# Altium PCB PCB_TKeyboard_2021-06-10.pcbdoc
Units mil, origin at the board's own origin, x right, y up, seen from the top; angles counter-clockwise.
Board outline 5610 x 5200 mil, 2 copper layers (Top Layer, Bottom Layer); 26 components, 27 nets, 74 pads, 11 vias.
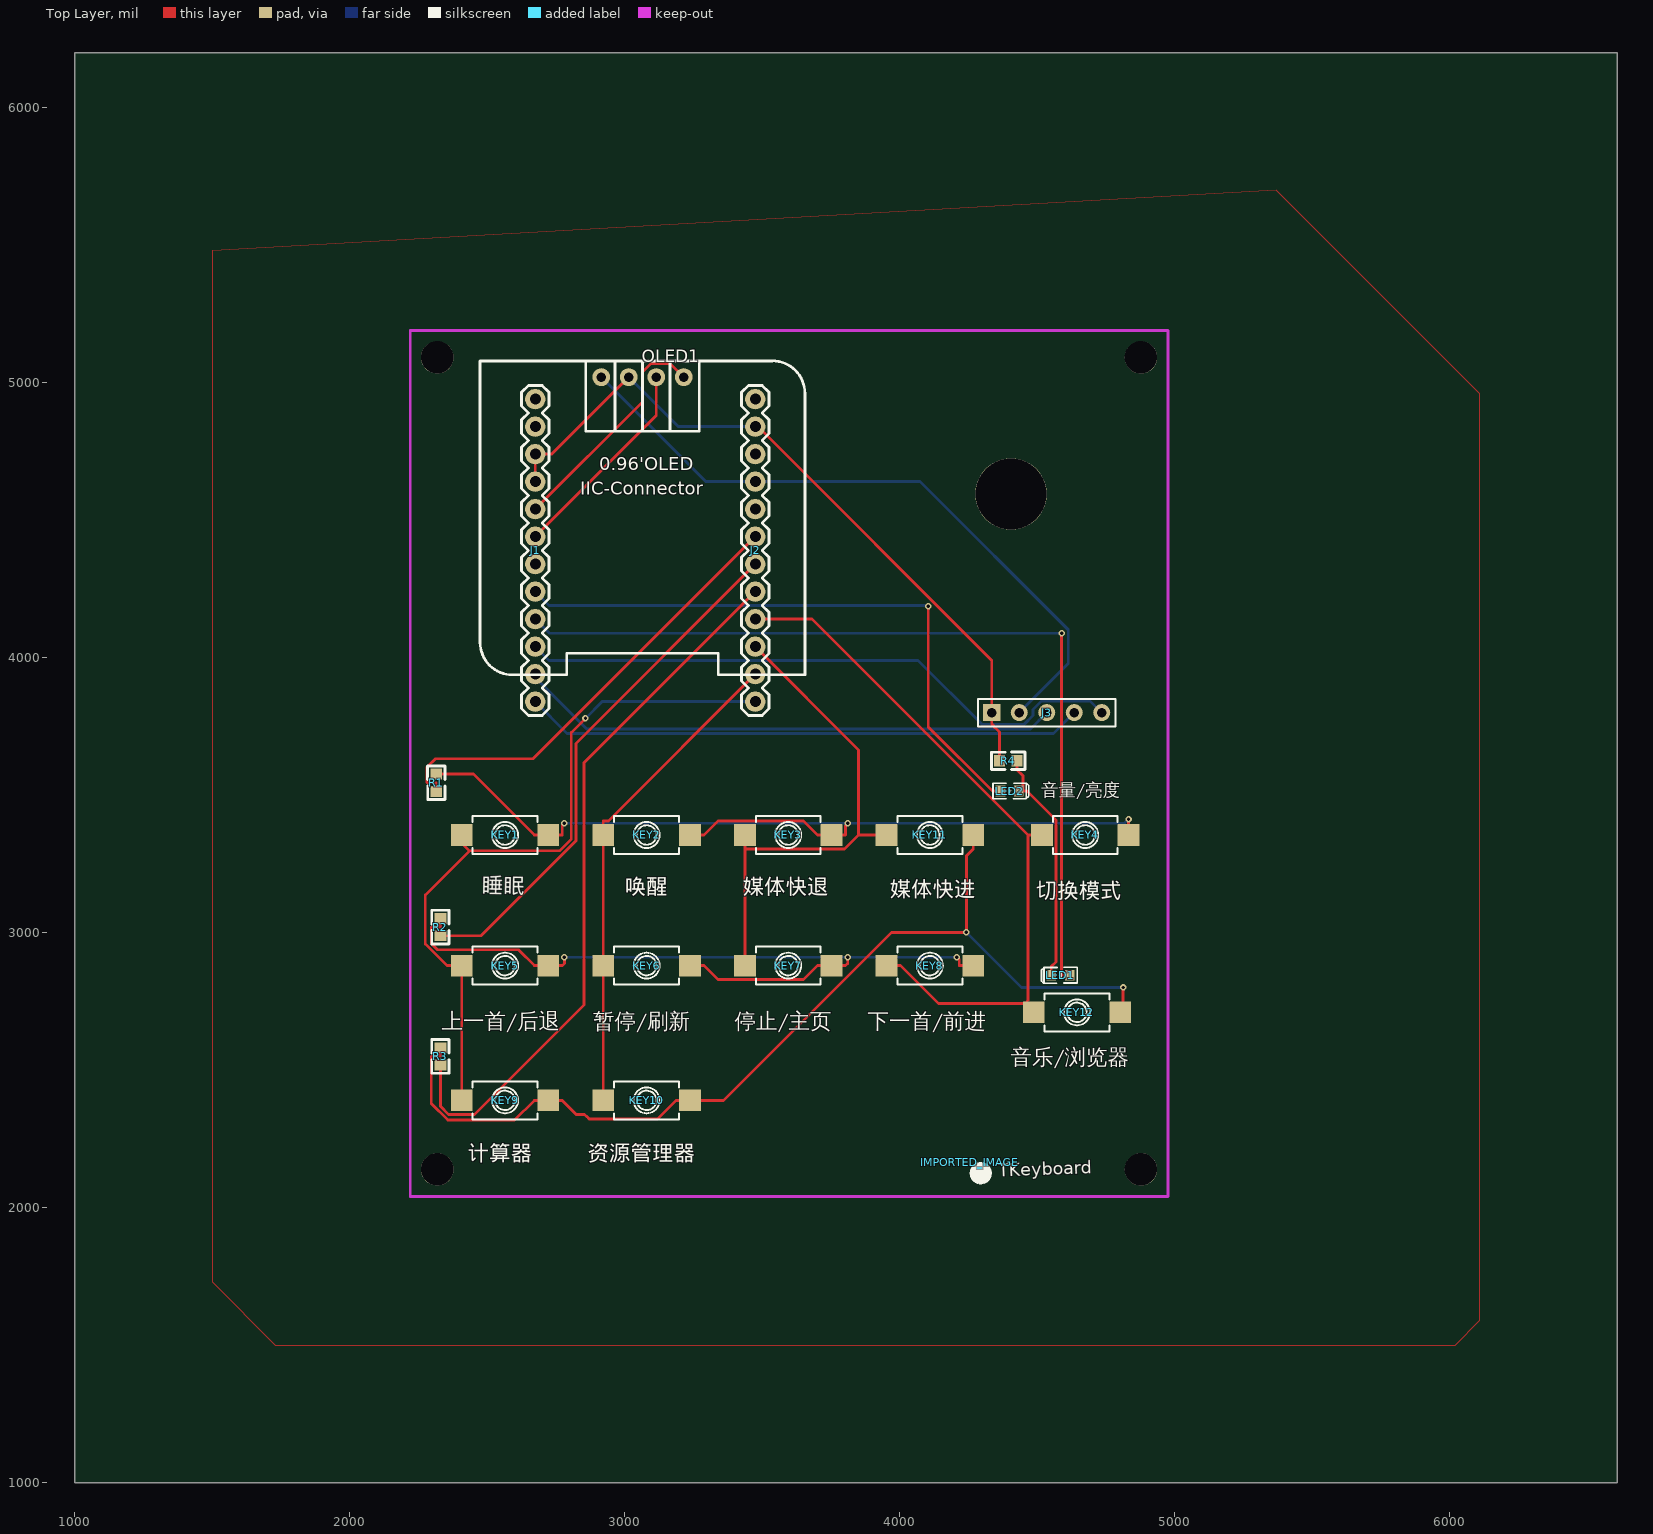
[diagram p0: Top Layer view]
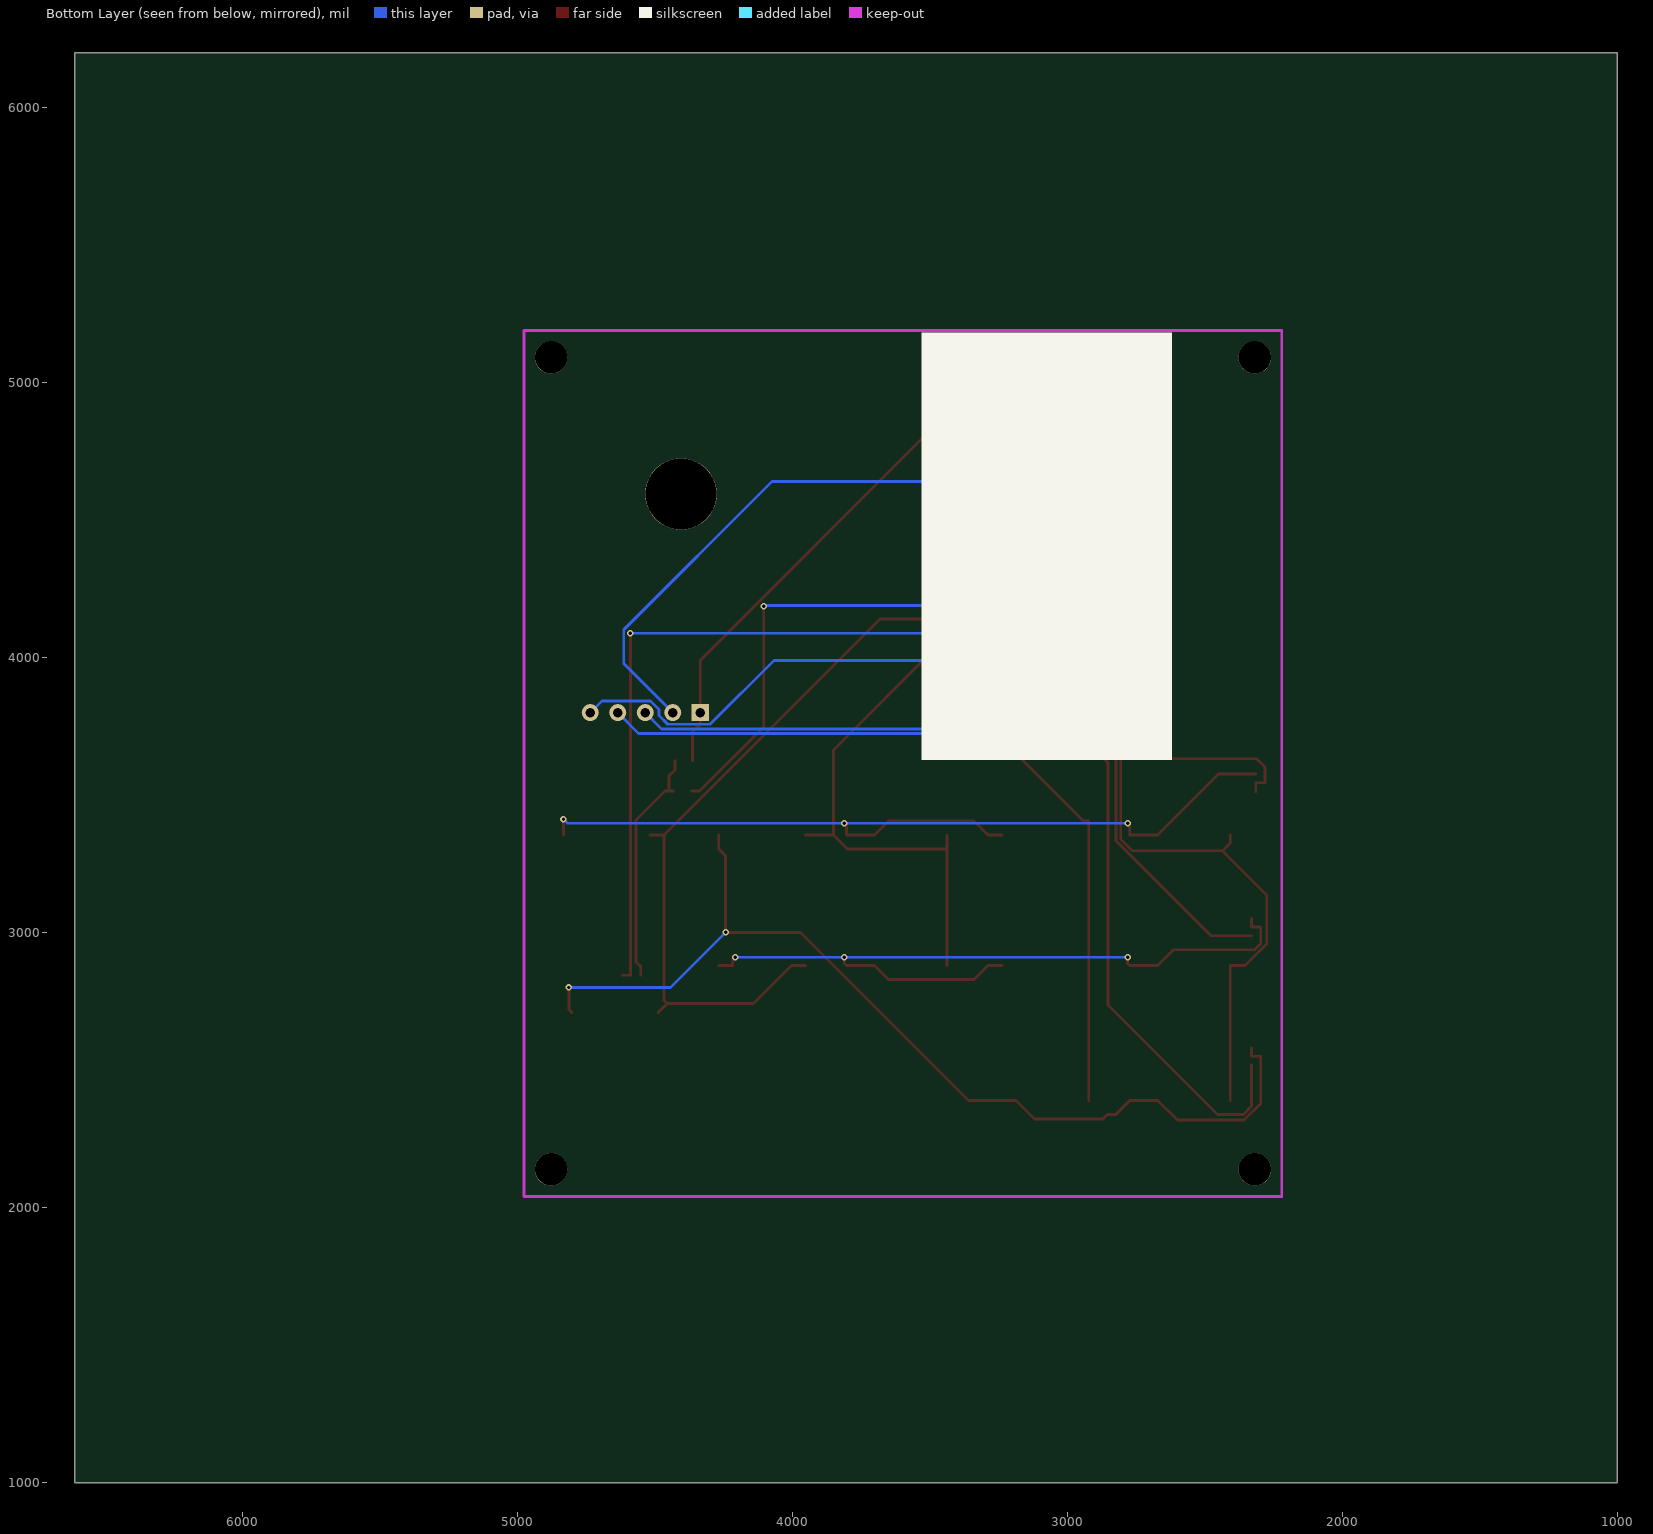
[diagram p1: Bottom Layer view, seen from below]

## Layer stack, top to bottom
Top Layer: signal copper (thickness not stored)
Dielectric: dielectric 12.6, FR-4, Dk 4.8
Bottom Layer: signal copper (thickness not stored)

## Board outline
6610,1000 1000,1000 1000,6200 6610,6200

## Components (designator, comment, footprint, x,y, rotation, side; value= is the part's Value field where it differs from the comment)
IMPORTED_IMAGE "IMPORTED_IMAGE" IMPORTED_IMAGE 4255.7,2164.3 r0 top
J1 "1X12" 1X12 2675,4440 r90 top
J2 "1X12" 1X12 3475,4440 r90 top
J3 "HDR-M-2.54_1x5" HDR-M-2.54_1X5 4535,3800 r0 top
KEY1 "K2-3.6×6.1_SMD" KEY-SMD_2P-L6.0-W3.5-P8.00-L 2565,3355 r0 top
KEY2 "K2-3.6×6.1_SMD" KEY-SMD_2P-L6.0-W3.5-P8.00-L 3080,3355 r0 top
KEY3 "K2-3.6×6.1_SMD" KEY-SMD_2P-L6.0-W3.5-P8.00-L 3595,3355 r0 top
KEY4 "K2-3.6×6.1_SMD" KEY-SMD_2P-L6.0-W3.5-P8.00-L 4675,3355 r0 top
KEY5 "K2-3.6×6.1_SMD" KEY-SMD_2P-L6.0-W3.5-P8.00-L 2565,2880 r0 top
KEY6 "K2-3.6×6.1_SMD" KEY-SMD_2P-L6.0-W3.5-P8.00-L 3080,2880 r0 top
KEY7 "K2-3.6×6.1_SMD" KEY-SMD_2P-L6.0-W3.5-P8.00-L 3595,2880 r0 top
KEY8 "K2-3.6×6.1_SMD" KEY-SMD_2P-L6.0-W3.5-P8.00-L 4110,2880 r0 top
KEY9 "K2-3.6×6.1_SMD" KEY-SMD_2P-L6.0-W3.5-P8.00-L 2565,2390 r0 top
KEY10 "K2-3.6×6.1_SMD" KEY-SMD_2P-L6.0-W3.5-P8.00-L 3080,2390 r0 top
KEY11 "K2-3.6×6.1_SMD" KEY-SMD_2P-L6.0-W3.5-P8.00-L 4110,3355 r0 top
KEY12 "K2-3.6×6.1_SMD" KEY-SMD_2P-L6.0-W3.5-P8.00-L 4645,2710 r0 top
LED1 "LED-0603_R" LED0603_RED 4585,2845 r180 top
LED2 "LED-0603_R" LED0603_RED 4400,3515 r0 top
OLED1 "0.96OLED_4P" 0.96OLED_4P 3065,5020 r0 top
R1 "1k" R0603 2315,3545 r270 top
R2 "1k" R0603 2330,3020 r270 top
R3 "1k" R0603 2330,2550 r270 top
R4 "1k" R0603 4395,3625 r180 top
? "" ? 2045.07,3615.2 r0 top
? "" ? 3597.95,5289.65 r0 top
? "" ? 2448.97,5140.78 r0 top

## Footprints (in the part's own frame and the unit in brackets; to place one, negate y for a bottom-side part, rotate by r counter-clockwise, add the part's x,y. Pads: shape width x height; smd on the part's side, far side on the other; paste and mask are expansions set on the pad)
0.96OLED_4P [mm]
  round 1.65 hole 0.89: 1(-3.81,-0.001) 2(-1.27,0.002) 3(1.27,0.002) 4(3.81,0.002)
  silkscreen extent -15,-27.5 15,1.5
1X12 [mil]
  round 74 hole 40: 1(-600,0) 2(-500,0) 3(-400,0) 4(-300,0) 5(-200,0) 6(-100,0) 7(0,0) 8(100,0) 9(200,0) 10(300,0) 11(400,0) 12(500,0)
  silkscreen extent -650,-50 550,50
HDR-M-2.54_1X5 [mil]
  rect 62x62 hole 35: 1(-200,0)
  round 62 hole 35: 2(-100,0) 3(0,0) 4(100,0) 5(200,0)
  silkscreen extent -250,-50 250,50
IMPORTED_IMAGE [mil]
  silkscreen extent 0,-79 79,0
KEY-SMD_2P-L6.0-W3.5-P8.00-L [mm]
  rect 2x2 smd: 1(-4,0) 2(4,0)
  silkscreen extent -3,-1.75 3,1.75
LED0603_RED [mm]
  rect 0.9x1 smd: 1(-0.85,0) 2(0.85,0)
  silkscreen extent -1.54,-0.73 1.75,0.73
R0603 [mm]
  rect 1x1.1 smd: 1(-0.8,0) 2(0.8,0)
  silkscreen extent -1.55,-0.8 1.55,0.81
? [mil]

## Free pads (board coordinates)
  round 118.11 hole 118.11 unplated: 0(2318.43,2138.82) 0(2318.43,5091.57) 0(4877.48,2138.82) 0(4877.48,5091.57)
  round 259.84 hole 259.84: 0(4404.99,4595.01)

## Via types
v1: diameter 24.02, hole 12.2, Top Layer to Bottom Layer, 11 vias

## Nets (pads, with @x,y where several pads share a name; then routed paths per layer and width w, separated by ;. In a path a pad name is that pad's centre, name@x,y a point inside that pad or via, vN(x,y) a via of type N, cw(c..) or ccw(c..) an arc to the next point about the centre after c; other vN are vias at no path point)
0: pad.0@4877.48,5091.57
4: J1.6
5: J1.5 LED2.1 | length 2249
  Top Layer w10.24: v1(4104.3,4187) 4104.3,3748 4337.3,3515 LED2.1
  Bottom Layer w10.24: J1.5 2725,4190 4101.4,4190 v1(4104.3,4187)
6: J1.4 LED1.1 | length 3208.3
  Top Layer w10.24: v1(4589.2,4088.5) 4589.2,2845 LED1.1
  Bottom Layer w10.24: J1.4 2726.5,4088.5 v1(4589.2,4088.5)
10: J2.1 KEY1.1 KEY5.1 KEY9.1 | length 2620.2
  Top Layer w10.24: KEY9.1 KEY5.1 2353.5,2880 2275.3,2958.2 2275.3,3137.2 2435.5,3297.4 ; KEY1.1 2407.5,3325.4 2435.5,3297.4 ; v1(2857.5,3779) 2806.2,3727.7 2806.2,3341 2762.7,3297.4 2435.5,3297.4
  Bottom Layer w10.24: v1(2857.5,3779) 2918.5,3840 J2.1
14: J2.3 KEY3.1 KEY7.1 KEY11.1 | length 1851.7
  Top Layer w10.24: KEY7.1 3437.5,3304 ; KEY3.1 3437.5,3304 ; J2.3 3850.6,3664.4 3850.6,3355 ; KEY11.1 3901.6,3355 3850.6,3355 ; 3437.5,3304 3799.6,3304 3850.6,3355
15: J2.4 KEY4.1 KEY8.1 KEY12.1 | length 2590.4
  Top Layer w10.24: J2.4 3681.6,4140 4466.6,3355 ; KEY8.1 4003.4,2880 4141,2742.4 KEY12.1@4455.2,2742.4 ; KEY12.1 KEY12.1@4455.2,2742.4 ; KEY4.1 4466.6,3355 ; KEY12.1@4455.2,2742.4 4466.6,2753.8 4466.6,3355
16: J2.2 KEY2.1 KEY6.1 KEY10.1 | length 1789.6
  Top Layer w10.24: KEY10.1 KEY6.1 KEY2.1 2922.5,3405.9 2940.9,3405.9 J2.2
18: J2.5 R3.2 | length 2610.3
  Top Layer w10.24: R3.2 2330,2368.8 2359.8,2339 2454.6,2339 2852.7,2737.2 2852.7,3617.7 J2.5
19: J2.6 R2.2 | length 1912
  Top Layer w10.24: R2.2 2477.3,2988.5 2822.9,3334.1 2822.9,3687.8 J2.6
20: J2.7 R1.2 | length 1660.9
  Top Layer w10.24: R1.2 2315,3544.7 2283.8,3544.7 2281.8,3546.7 2281.8,3602.1 2311.9,3632.2 2667.2,3632.2 J2.7
21: J2.8
CLK: J1.3 J3.5 | length 2242.8
  Bottom Layer w10.24: J1.3 2725,3990 4066.7,3990 4299.2,3757.5 4453.4,3757.5 4485,3789.1 4485,3811.2 4516.3,3842.5 4692.5,3842.5 J3.5
DT: J1.1 J3.4 | length 2039.4
  Bottom Layer w10.24: J1.1 2790.8,3724.2 4559.2,3724.2 J3.4
GND: J1.9 J1.10 J2.11 J3.1 OLED1.2 R4.2 | length 2679.2
  Top Layer w10.24: J1.9 J1.10 2735,4740 OLED1.2@3015,5020 ; J2.11 3484.6,4840 4335,3989.6 J3.1 4335,3757.5 4363.5,3729 R4.2
  Bottom Layer w10.24: OLED1.2@3015,5020 3195.1,4840 J2.11
J1_11: J1.11
J1_12: J1.12
J2_10: J2.10
J2_12: J2.12
KEY1_2: KEY1.2 KEY2.2 KEY3.2 KEY4.2 R1.1 | length 3366.6
  Top Layer w10.24: R1.1 2450.1,3576.5 2671.6,3355 2697,3355 KEY1.2 2773.4,3355 2773.4,3390.8 v1(2780.6,3398) ; KEY2.2 3262.9,3355 3288.4,3355 3339.2,3405.9 3650.7,3405.9 3701.6,3355 KEY3.2 3803.4,3355 3803.4,3389.5 v1(3811.9,3398) ; KEY4.2 4832.5,3405.9 v1(4832.5,3412.8)
  Bottom Layer w10.24: v1(2780.6,3398) v1(3811.9,3398) 4817.7,3398 v1(4832.5,3412.8)
KEY5_2: KEY5.2 KEY6.2 KEY7.2 KEY8.2 R2.1 | length 2821.2
  Top Layer w10.24: R2.1 2330,3020.3 2298.8,3020.3 2296.8,3018.3 2296.8,2960.3 2319.3,2937.8 2613.8,2937.8 2671.6,2880 KEY5.2 2773.4,2880 2781,2887.7 v1(2781,2910.7) ; KEY6.2 3262.9,2880 3288.4,2880 3339.2,2829.1 3650.7,2829.1 3701.6,2880 KEY7.2 3803.4,2880 3811.4,2888 v1(3811.4,2910.7) ; v1(4208,2910.7) 4216.6,2902.1 4216.6,2880 KEY8.2
  Bottom Layer w10.24: v1(2781,2910.7) v1(3811.4,2910.7) v1(4208,2910.7)
KEY9_2: KEY9.2 KEY10.2 KEY11.2 KEY12.2 R3.1 | length 3656.8
  Top Layer w10.24: R3.1 2330,2550.3 2298.8,2550.3 2296.8,2548.3 2296.8,2378.3 2357.1,2318.1 2599.7,2318.1 2671.6,2390 KEY9.2 2773.4,2390 2824.2,2339.1 2853.9,2339.1 2862.2,2330.8 2863.2,2330.8 2871.5,2322.5 3119.1,2322.5 3186.6,2390 3212,2390 KEY10.2 3359.5,2390 3970.5,3001 v1(4242.8,3001) 4242.8,3279.4 4267.5,3304.1 KEY11.2 ; KEY12.2 4812.6,2720.1 v1(4812.6,2800.7)
  Bottom Layer w10.24: v1(4242.8,3001) 4443.2,2800.7 v1(4812.6,2800.7)
LED1_2: LED1.2 LED2.2 R4.1 | length 869
  Top Layer w10.24: R4.1 4426.5,3591.8 4448.1,3570.3 LED2.2@4448.1,3515 ; LED2.2 LED2.2@4448.1,3515 ; LED1.2 4551.5,2876.2 4568.4,2893.1 4568.4,3409.3 4462.7,3515 LED2.2@4448.1,3515
SCL: J1.7 OLED1.3 | length 762.3
  Top Layer w10.24: J1.7 3115,4880 OLED1.3@3115,5020
SDA: J1.8 OLED1.4 | length 843.8
  Top Layer w10.24: J1.8 3065,4930 3065,5039 3095.6,5069.6 3165.5,5069.6 OLED1.4@3215,5020
SW: J1.2 J3.3 | length 1973.9
  Bottom Layer w10.24: J1.2 2675,3928.3 2862.5,3740.8 4475.8,3740.8 J3.3
VCC: J2.9 J3.2 OLED1.1 | length 2453.6
  Bottom Layer w10.24: OLED1.1@2915,5019.9 3295,4640 J2.9 4074.4,4640 4613,4101.4 4613,3978 J3.2

## Polygon pours and split planes (outlines as drawn)
GND on Top Layer (solid): 1500,5480 1500,1730 1730,1500 6020,1500 6110,1590 6110,4960 5370,5700

## Silkscreen, mask and mechanical layers (free items; w line width, h text height)
Top Overlay:
  text "音量/亮度" at 4515,3480 h78.74
  text "睡眠" at 2480,3125 h98.42 r359
  text "唤醒" at 3000,3120 h98.42
  text "媒体快退" at 3430,3120 h98.42
  text "媒体快进" at 3965,3110 h98.42
  text "切换模式" at 4495,3105 h98.42
  text "下一首/前进" at 3885,2630.7 h98.42
  text "上一首/后退" at 2335,2630 h98.42
  text "暂停/刷新" at 2885,2630 h98.42
  text "停止/主页" at 3400,2630 h98.42
  text "音乐/浏览器" at 4405,2500 h98.42
  text "计算器" at 2430,2150 h98.42
  text "资源管理器" at 2865,2149.6 h98.42
  text "TKeyboard" at 4360,2095 h78.74 r2
Bottom Overlay:
  rectangle: 2620.28,3627.44 3529.73,5182.56
Document:
  circle w10: c4400,4590 r590.55

## Text inside footprints (layer, text, board x,y; h text height)
OLED1: Top Overlay "IIC-Connector" at 2838.4,4592.94 h47.24; Top Overlay "0.96'OLED" at 2907.6,4681.43 h47.24